# Altium PCB PCB1.PcbDoc
Units mil, origin at the board's own origin, x right, y up, seen from the top; angles counter-clockwise.
Board outline 6000 x 4000 mil, 2 copper layers (Top Layer, Bottom Layer); 19 components, 19 nets, 68 pads, 4 vias.
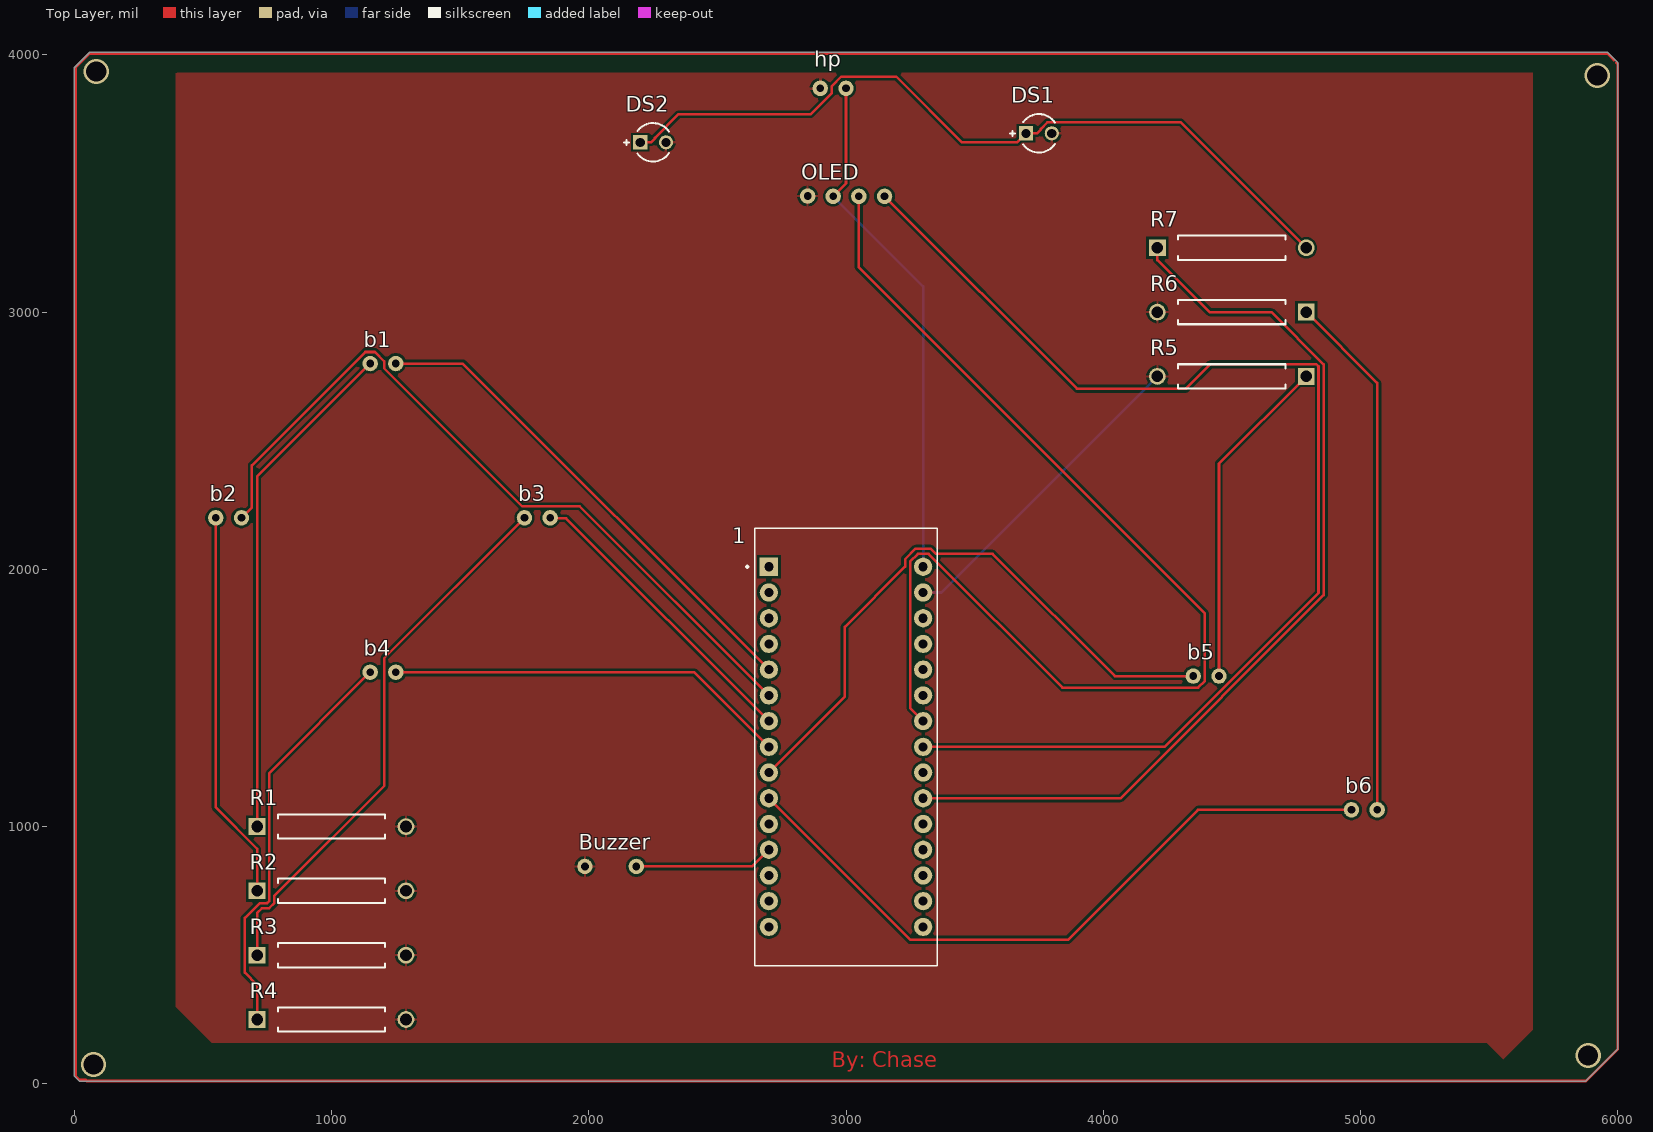
[diagram p0: Top Layer view]
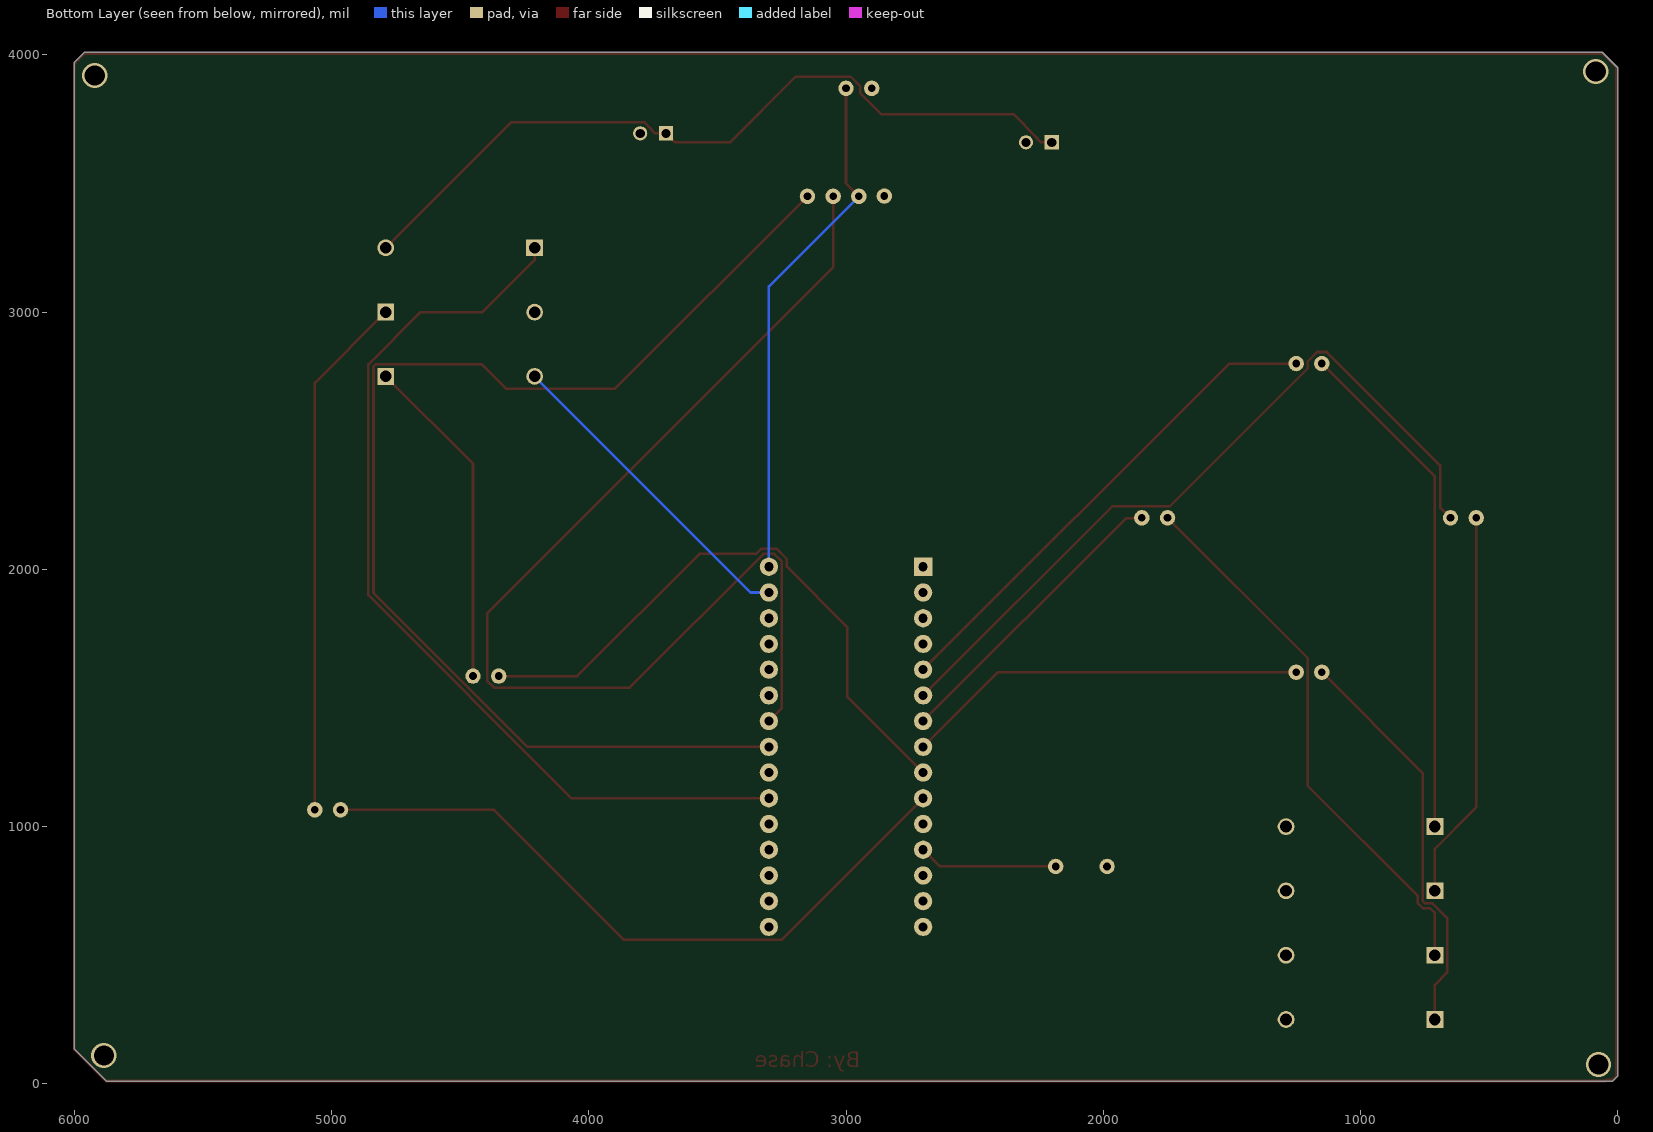
[diagram p1: Bottom Layer view, seen from below]

## Layer stack, top to bottom
Top Solder: solder mask 0.4, Solder Resist, Dk 3.5
Top Layer: signal copper 1.4
Dielectric 1: dielectric 12.6, FR-4, Dk 4.8
Bottom Layer: signal copper 1.4
Bottom Solder: solder mask 0.4, Solder Resist, Dk 3.5

## Board outline
20,10 0,30 0,3950 60,4010 5960,4010 6000,3970 6000,135 5875,10

## Design rules (kind name [scope] priority, off if disabled: settings)
Clearance [All] p1: gap=10 ignorepadtopadclearanceinfootprint=FALSE
PolygonConnect [All] p1: connectstyle=Relief reliefconductorwidth=10 reliefentries=4 polygonreliefangle="90 Angle" airgapwidth=10
RoutingVias [All] p1: holewidth=28 width=50 viastyle="Through Hole" minholewidth=28 minwidth=50 maxholewidth=28 maxwidth=50
SolderMaskExpansion [All] p1: expansion=4 istentingtop=FALSE
SupplyNets "Schematic Supply Nets_1" [InNet('VCC')] p1: voltage=0.000
SupplyNets "Schematic Supply Nets" [InNet('GND')] p2: voltage=0.000
Width [All] p1: maxlimit=10 minlimit=10 preferedwidth=10
30 further rules are at their usual default settings.

## Components (designator, comment, footprint, x,y, rotation, side; value= is the part's Value field where it differs from the comment)
1 "ARDUINO_NANO" MODULE_ARDUINO_NANO 3000,1310 r0 top
b1 "2 head button" "2 head button" 1250,2800 r180 top locked
b2 "2 head button" "2 head button" 650,2200 r180 top locked
b3 "2 head button" "2 head button" 1850,2200 r180 top locked
b4 "2 head button" "2 head button" 1250,1600 r180 top locked
b5 "2 head button" "2 head button" 4350,1585 r0 top
b6 "2 head button" "2 head button" 4965,1065 r0 top
Buzzer "Buzzer" buzzer 2185,845 r180 top
DS1 "LTL-1CHE" INDPR60-254-520X380X650 3750,3695 r0 top locked
DS2 "LTL-1CHE" INDPR60-254-520X380X650 2250,3660 r0 top locked
hp "hp" hp 3000,3870 r180 top
OLED "OLED" OLED 2850,3450 r0 top
R1 "Resistors" RESA86-1060X240 1000,1000 r0 top locked
R2 "Resistors" RESA86-1060X240 1000,750 r0 top locked
R3 "Resistors" RESA86-1060X240 1000,500 r0 top locked
R4 "Resistors" RESA86-1060X240 1000,250 r0 top locked
R5 "Resistors" RESA86-1060X240 4500,2750 r180 top
R6 "Resistors" RESA86-1060X240 4500,3000 r180 top locked
R7 "Resistors" RESA86-1060X240 4500,3250 r0 top

## Footprints (in the part's own frame and the unit in brackets; to place one, negate y for a bottom-side part, rotate by r counter-clockwise, add the part's x,y. Pads: shape width x height; smd on the part's side, far side on the other; paste and mask are expansions set on the pad)
"2 head button" [mil]
  round 60 hole 30: 1(0,0) 2(100,0)
buzzer [mil]
  round 60 hole 30: 1(0,0) 2(200,0)
hp [mil]
  round 60 hole 30: 1(0,0) 2(100,0)
INDPR60-254-520X380X650 [mm] "THD, 2-Leads, Dia 3.8mm, Pitch 2.54mm"
  rect 1.4x1.4 hole 0.9: 1(-1.27,0)
  round 1.4 hole 0.9: 2(1.27,0)
  silkscreen extent -2.87,-1.9 1.58,1.9, body extent -1.9,-1.9 1.9,1.9, height 6.5
MODULE_ARDUINO_NANO [mm]
  rect 1.8x1.8 / inner round 1.8 / far side rect 1.8x1.8 hole 0.9: 1(-7.62,17.78)
  round 1.8 hole 0.9: 2(-7.62,15.24) 3(-7.62,12.7) 4(-7.62,10.16) 5(-7.62,7.62) 6(-7.62,5.08) 7(-7.62,2.54) 8(-7.62,0) 9(-7.62,-2.54) 10(-7.62,-5.08) 11(-7.62,-7.62) 12(-7.62,-10.16) 13(-7.62,-12.7) 14(-7.62,-15.24) 15(-7.62,-17.78) 16(7.62,-17.78) 17(7.62,-15.24) 18(7.62,-12.7) 19(7.62,-10.16) 20(7.62,-7.62) 21(7.62,-5.08) 22(7.62,-2.54) 23(7.62,0) 24(7.62,2.54) 25(7.62,5.08) 26(7.62,7.62) 27(7.62,10.16) 28(7.62,12.7) 29(7.62,15.24) 30(7.62,17.78)
  silkscreen extent -9.85,-21.6 9,21.6, body extent -9,-23.4 9,21.6, height 12.6
OLED [mil]
  round 60 hole 30: 1(0.79,1.13) 2(100,0) 3(200,0) 4(300,0)
RESA86-1060X240 [mm] "Axial Resistor, 2-Leads, Dia 2.4mm, Body Length 10.6mm"
  rect 1.65x1.65 hole 1.15: 1(-7.35,0)
  round 1.65 hole 1.15: 2(7.35,0)
  silkscreen extent -5.3,-1.2 5.3,1.2, body extent -7.76,-1.19 7.76,1.2, height 2.4

## Part data
1: library part CMP-015-000000-1, "Small, complete, and breadboard-friendly board based on the ATmega328 (Arduino Nano 3.x)", Package="Non-Standard Arduino", Check_prices=https://www.snapeda.com/parts/Arduino%20Nano/Arduino/view-part/?ref=eda, Component Type=Standard, Design Item ID=ARDUINO_NANO, MF=Arduino, MP="Arduino Nano", Pin Count=30, SnapEDA_Link=https://www.snapeda.com/parts/Arduino%20Nano/Arduino/view-part/?ref=snap, Source=ARDUINO_NANO.SchLib
DS1 DS2: library part CMP-007-00018-2, "LED Uni-Color Red, 100 mW, 30 mA, -55 to 100 degC, 2-Pin THD, RoHS, Bulk", Case/Package=Radial, Colour=Red, Forward Current=20mA, Forward Voltage=2V, Manufacturer=Lite-On, Max Operating Temperature=100°C, Min Operating Temperature=-55°C, Package Description="2-Pin Through Hole Device, Dia 3.8 mm, Pitch 2.54 mm", Package Quantity=1000, Datasheet URL=https://datasheet.ciiva.com/15117/getdatasheetpartid-187746-15117985.pdf, Datasheet Version=Dec-03, Illumination Colour=Red, Lens Style=Dome, Luminous Intensity=12.6mcd, Manufacturer URL=http://www.us.liteon.com/, Mounting Technology=TH, Nominal Vf=2V, Package Reference=LTL-1CHE, Packaging=Bulk, Pins=2, RoHS Compliant=True, Viewing Angle=60degrees
R1 R2 R3 R4 R5 R6 R7: "Resistor", Component Type=Resistors

## Via types
v1: diameter 98.43, hole 78.74, Top Layer to Bottom Layer, 4 vias

## Nets (pads, with @x,y where several pads share a name; then routed paths per layer and width w, separated by ;. In a path a pad name is that pad's centre, name@x,y a point inside that pad or via, vN(x,y) a via of type N, cw(c..) or ccw(c..) an arc to the next point about the centre after c; other vN are vias at no path point)
GND: 1.29 Buzzer.2 DS1.2 DS2.2 hp.2 OLED.1 R1.2 R2.2 R3.2 R4.2 R5.2 R6.2 | length 1258.6
  Bottom Layer w10: 1.29 3370.63,1910 R5.2
Net1_5: 1.5 b1.1 | length 1942.9
  Top Layer w10: b1.1 1510,2800 1.5
Net1_6: 1.6 b2.1 | length 2982
  Top Layer w10: b2.1 690.63,2240.63 690.63,2404.27 1131.36,2845 1168.64,2845 1205,2808.64 1205,2781.36 1741.36,2245 1965,2245 1.6
Net1_7: 1.7 b3.1 | length 1177.2
  Top Layer w10: b3.1 1851.47,2198.53 1911.47,2198.53 1.7
Net1_8: 1.8 b4.1 | length 1570.1
  Top Layer w10: b4.1 2410,1600 1.8
Net1_9: 1.9 b5.1 | length 2391.3
  Top Layer w10: 1.9 2995.38,1505.38 2995.38,1776.7 3229.57,2010.89 3229.57,2039.17 3270.83,2080.43 3329.17,2080.43 3349.17,2060.43 3570.07,2060.43 4045.51,1585 b5.1
Net1_10: 1.10 b6.1 | length 2702.4
  Top Layer w10: 1.10 3250.43,559.57 3862.57,559.57 4368.01,1065 b6.1
Net1_12: 1.12 Buzzer.1 | length 541.9
  Top Layer w10: Buzzer.1 2635,845 1.12
Net1_21: 1.21 R7.1 | length 3642.8
  Top Layer w10: 1.21 4066.92,1110 4856.85,1899.93 4856.85,2796.98 4654.08,2999.75 4413.4,2999.75 4210.63,3202.52 R7.1
Net1_23: 1.23 OLED.4 | length 4704.6
  Top Layer w10: OLED.4 3897.48,2702.52 4322.06,2702.52 4417.02,2797.48 4828.06,2797.48 4836.85,2788.69 4836.85,1908.21 4238.64,1310 1.23
Net1_24: 1.24 OLED.3 | length 4466.7
  Top Layer w10: OLED.3 3050,3173.92 4395,1828.92 4395,1566.36 4368.64,1540 3841.32,1540 3320.89,2060.43 3279.11,2060.43 3249.57,2030.89 3249.57,1460.43 1.24
Netb1_2: b1.2 R1.1 | length 1982
  Top Layer w10: R1.1 710.63,2360.63 b1.2
Netb2_2: b2.2 R2.1 | length 1516.5
  Top Layer w10: b2.2 550,1074.46 710.63,913.83 R2.1
Netb3_2: b3.2 R3.1 | length 2147.1
  Top Layer w10: R3.1 710.63,663.83 729.32,682.52 757.61,682.52 778.11,703.02 778.11,731.31 1205,1158.2 1205,1655 b3.2
Netb4_2: b4.2 R4.1 | length 1587.9
  Top Layer w10: R4.1 710.63,384.35 663.15,431.83 663.15,644.63 721.04,702.52 749.32,702.52 758.11,711.31 758.11,1208.11 b4.2
Netb5_2: b5.2 R5.1 | length 1305.6
  Top Layer w10: b5.2 4450,2410.63 R5.1
Netb6_2: b6.2 R6.1 | length 2049.2
  Top Layer w10: R6.1 5065,2724.37 b6.2
NetDS1_1: DS1.1 DS2.1 R7.2 | length 3053.9
  Top Layer w10: DS2.1 2242.56,3660 2257.44,3674.88 2257.44,3677.63 2349.31,3769.49 2863.13,3769.49 2945,3851.36 2945,3878.64 2981.36,3915 3195.68,3915 3450.68,3660 3665,3660 DS1.1 3742.56,3695 3757.44,3709.88 3757.44,3712.63 3782.37,3737.56 4301.81,3737.56 R7.2
VCC: 1.30 hp.1 OLED.2 | length 2025.7
  Top Layer w10: OLED.2 3000,3500 hp.1
  Bottom Layer w10: OLED.2 3300,3100 1.30
pads on no net: 1.1 1.2 1.3 1.4 1.11 1.13 1.14 1.15 1.16 1.17 1.18 1.19 1.20 1.22 1.25 1.26 1.27 1.28
copper on no net: | length 19825.1
  Top Layer w10: 5985,3980 5980,3985 5960,4005 60,4005 5,3950 5,30 20,15 44.19,15 48.4,10.79 5876.6,10.79 6000,134.19 6000,140 6000,180 6000,3965 5995,3970
  other v1: 75,75 5885,110 5920,3920 85,3935

## Polygon pours and split planes (outlines as drawn)
GND on Top Layer "GND_L01_P000" (solid, pour order 0): 395,3935 400,3930 5670,3930 5670,210 5555,95 5490,160 535,160 395,300

## Other copper
Top Layer:
  text "By: Chase" at 2945,64.99 h60